# Altium PCB 万年历.PcbDoc
Units mm, origin at the board's own origin, x right, y up, seen from the top; angles counter-clockwise.
Board outline 152.4 x 101.6 mm, 2 copper layers (Top Layer, Bottom Layer); 25 components, 35 nets, 134 pads, 5 vias.
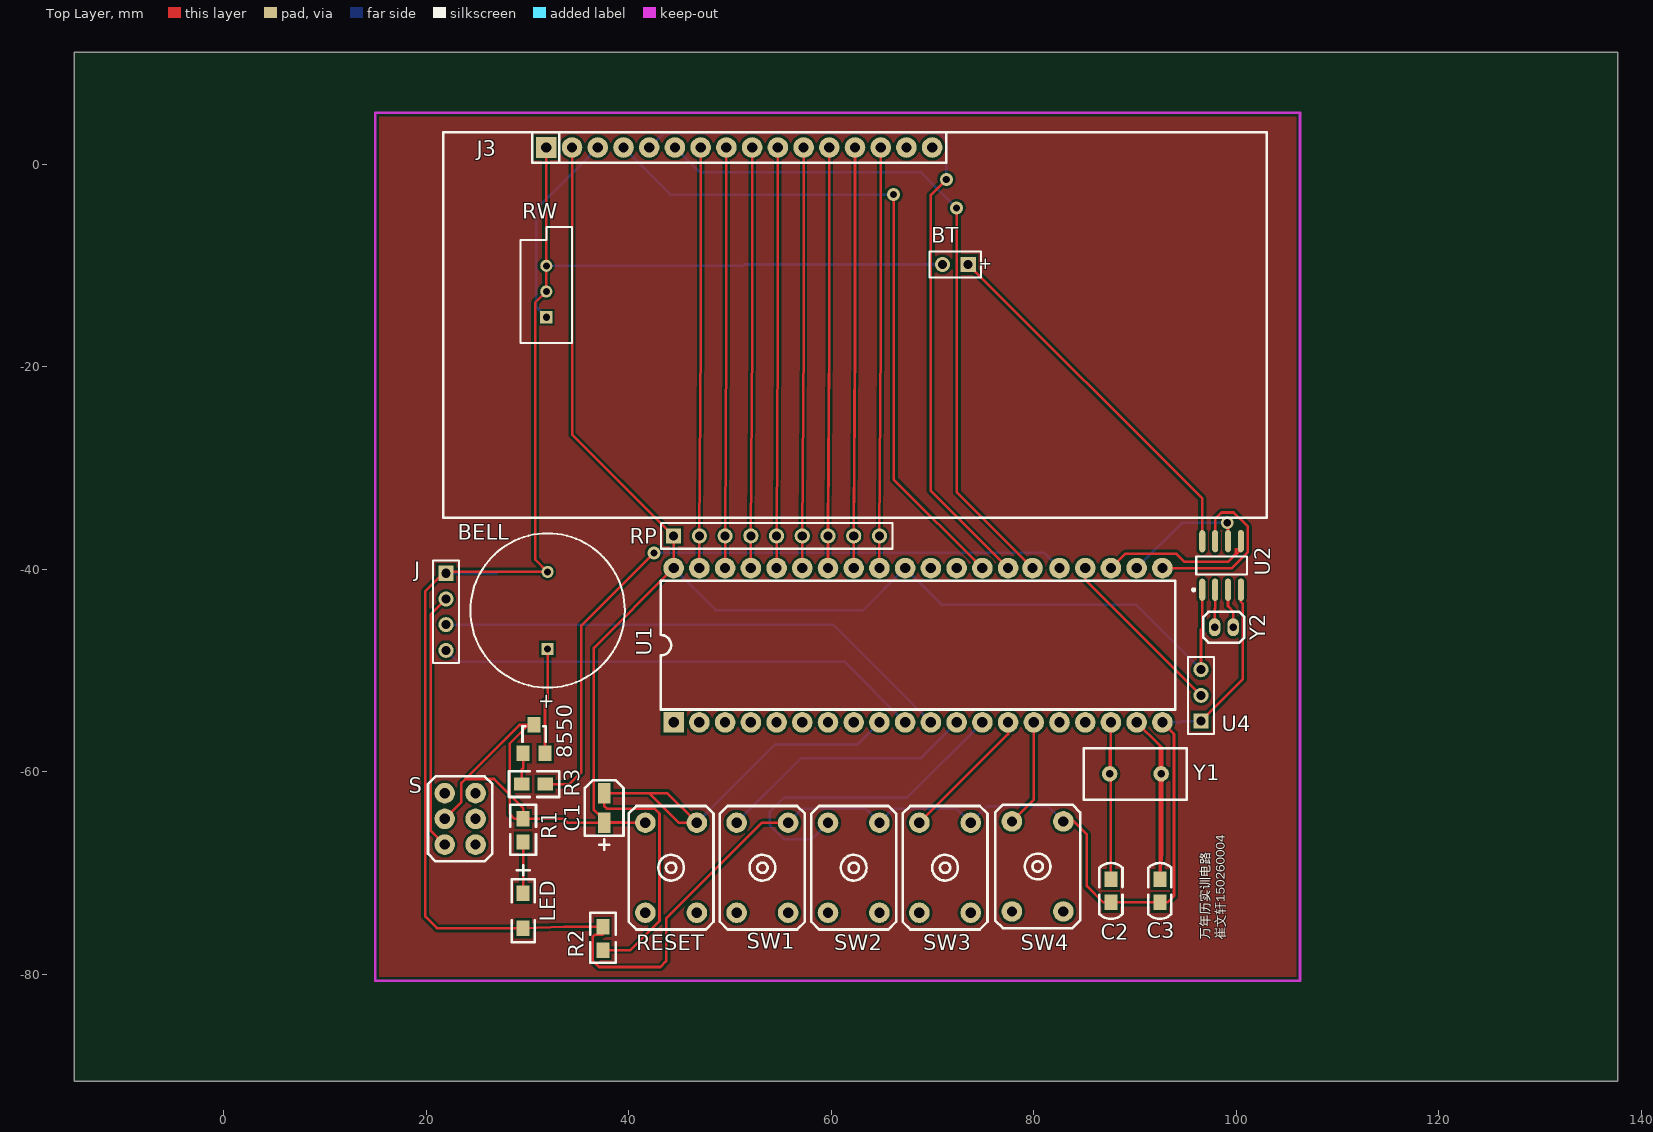
[diagram p0: Top Layer view]
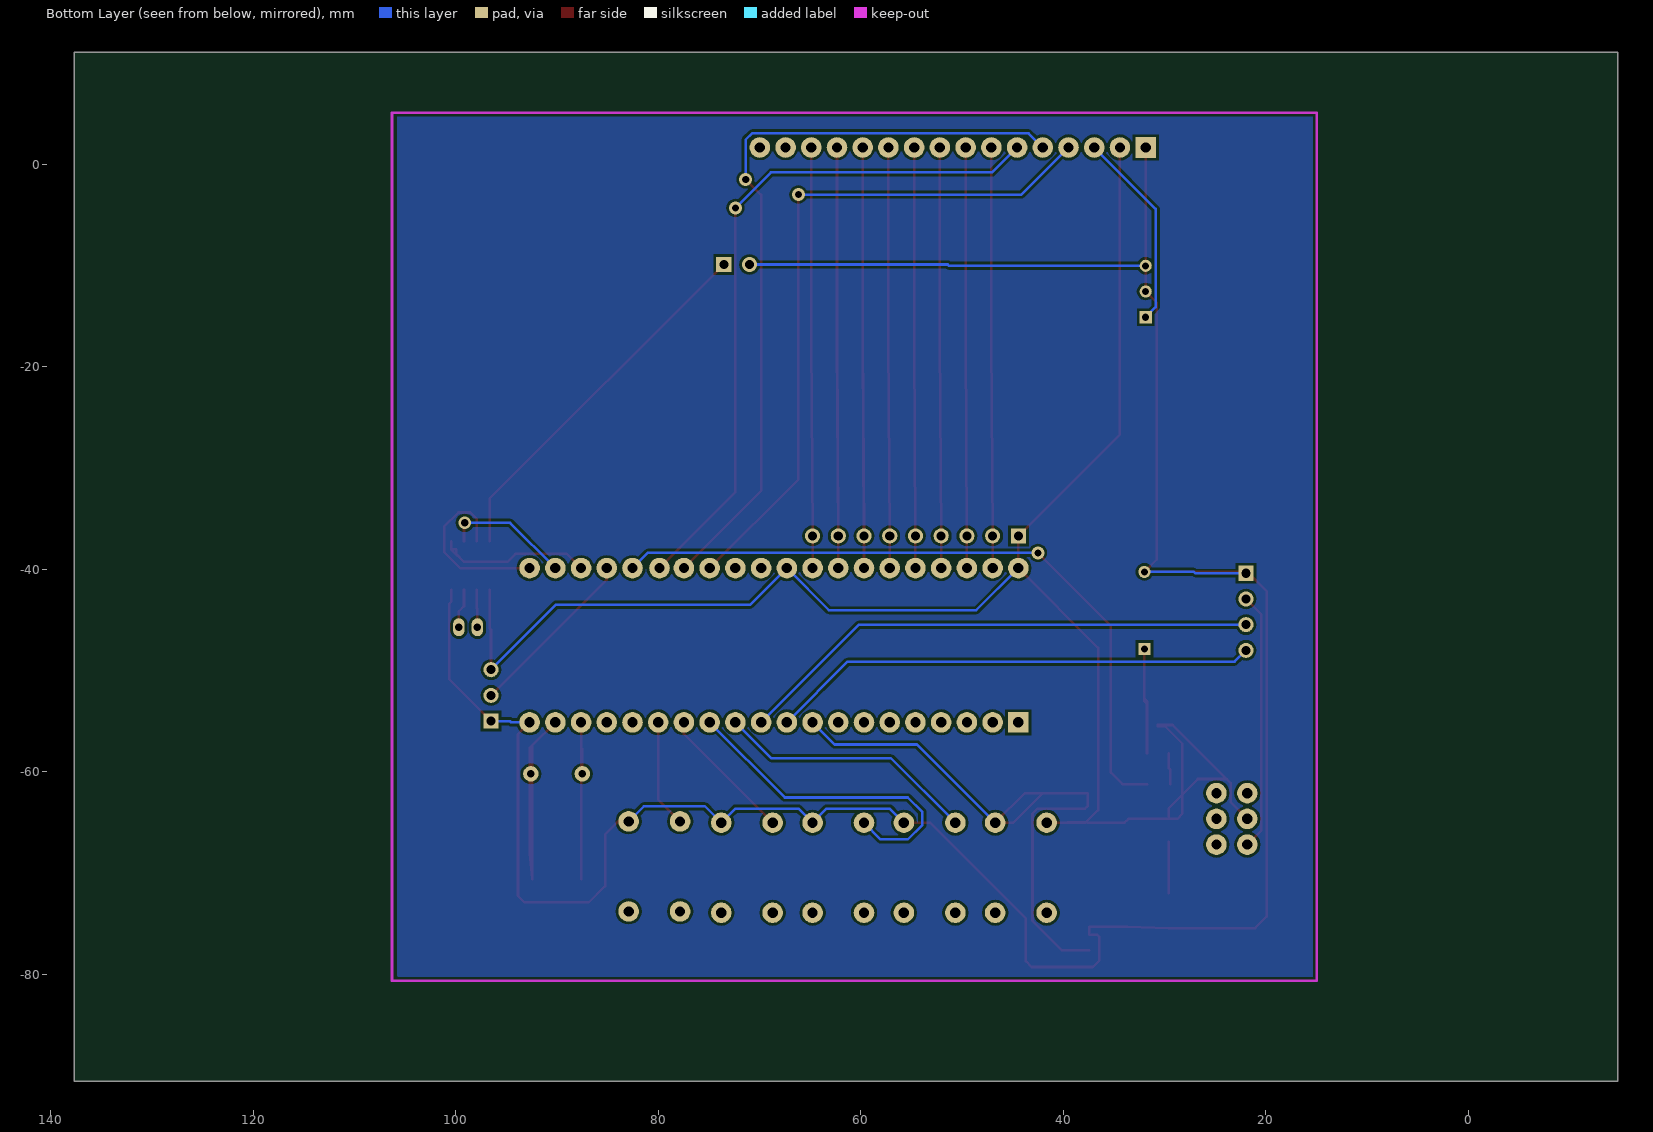
[diagram p1: Bottom Layer view, seen from below]

## Layer stack, top to bottom
Top Solder: solder mask 0.0102, Solder Resist, Dk 3.5
Top Layer: signal copper 0.0356
Dielectric 1: dielectric 0.32, FR-4, Dk 4.8
Bottom Layer: signal copper 0.0356
Bottom Solder: solder mask 0.0102, Solder Resist, Dk 3.5

## Board outline
-14.732,-90.551 137.668,-90.551 137.668,11.049 -14.732,11.049

## Design rules (kind name [scope] priority, off if disabled: settings)
Clearance [All] p1: gap=0.254 ignorepadtopadclearanceinfootprint=FALSE except(0: Arc-Hole Track-Hole SMDPad-Hole THPad-Hole Via-Hole Fill-Hole Poly-Hole Region-Hole Text-Hole)
PolygonConnect [All] p1: connectstyle=Relief reliefconductorwidth=0.254 reliefentries=4 polygonreliefangle="90 Angle" airgapwidth=0.254
RoutingVias [All] p1: holewidth=0.711 width=1.27 viastyle="Through Hole" minholewidth=0.711 minwidth=1.27 maxholewidth=0.711 maxwidth=1.27
SolderMaskExpansion [All] p1: expansion=0.102
Width [All] p1: maxlimit=0.254 minlimit=0.254 preferedwidth=0.254
30 further rules are at their usual default settings.

## Components (designator, comment, footprint, x,y, rotation, side; value= is the part's Value field where it differs from the comment)
8550 "2N3906" SOT_23_BCE 29.527,-58.166 r0 top
BELL "Bell" RB7.6-15 32.004,-44.069 r270 top (schematic designator LS?)
BT "Battery" BAT-2 72.263,-9.906 r180 top (schematic designator BT?)
C1 "Cap Pol1" c+ 37.592,-65.024 r90 top value=10uF
C2 "Cap" 0805-C 87.63,-71.755 r90 top value=22pF
C3 "Cap" 0805-C 92.456,-71.755 r90 top value=22pF
J "UART" HDR1X4 21.971,-40.386 r270 top
J3 "LCD1602" LCD1602 21.717,3.175 r0 top (schematic designator U3)
LED "LED" 1206-LED 29.591,-72.009 r270 top (schematic designator ?)
R1 "Res2" 0805-R 29.591,-65.786 r90 top value=1K
R2 "Res2" 0805-R 37.465,-76.454 r90 top value=10K
R3 "Res2" 0805-R 30.607,-61.214 r0 top value=1K
RESET "SW-PB" SW 44.196,-69.469 r270 top (schematic designator SW0)
RP "RP" HDR1X9 44.45,-36.703 r0 top (schematic designator 10K)
RW "RPot" VR5 31.877,-12.573 r90 top value=5K
S "SW-SPST" KEY 23.368,-64.643 r90 top
SW1 "SW-PB" SW 53.213,-69.469 r270 top
SW2 "SW-PB" SW 62.23,-69.469 r270 top
SW3 "SW-PB" SW 71.247,-69.469 r270 top
SW4 "SW-PB" SW 80.391,-69.342 r270 top
U1 "STC89C52" STC89C52 44.45,-55.118 r90 top
U2 "DS1302" SO8_N 98.552,-39.624 r90 top
U4 "DS18B20" HDR1X3 96.52,-54.991 r90 top
Y1 "XTAL" XTAL-11.0592M 95.123,-62.738 r180 top
Y2 "XTAL" XTAL-32.768K 98.781,-45.72 r90 top

## Footprints (in the part's own frame and the unit in brackets; to place one, negate y for a bottom-side part, rotate by r counter-clockwise, add the part's x,y. Pads: shape width x height; smd on the part's side, far side on the other; paste and mask are expansions set on the pad)
0805-C [mil]
  rect 60x50 smd: 1(-45,0) 2(45,0)
  silkscreen extent -109,-45 109,45
0805-R [mil]
  rect 60x50 smd: 1(-45,0) 2(45,0)
  silkscreen extent -95,-50 100,50
1206-LED [mil]
  rect 60x50 smd: 1(0,0) 2(135,0)
  silkscreen extent -110,-45 190,45
BAT-2 [mm] "Battery; 2 Leads"
  rect 1.5x1.5 hole 0.9: 1(-1.27,0)
  round 1.5 hole 0.9: 2(1.27,0)
  silkscreen extent -2.54,-1.27 2.54,1.27
c+ [mil]
  rect 80x50 smd: 1(0,0) 2(115,0)
  silkscreen extent -105,-75 165,75
HDR1X3 [mm] "Connector; Header; 3 Position"
  rect 1.5x1.5 hole 0.9: 1(0,0)
  round 1.5 hole 0.9: 2(2.54,0) 3(5.08,0)
  silkscreen extent -1.27,-1.27 6.35,1.27
HDR1X4 [mm] "Connector; Header; 4 Position"
  rect 1.5x1.5 hole 0.9: 1(0,0)
  round 1.5 hole 0.9: 2(2.54,0) 3(5.08,0) 4(7.62,0)
  silkscreen extent -1.27,-1.27 8.89,1.27
HDR1X9 [mm] "Connector; Header; 9 Position"
  rect 1.5x1.5 hole 0.9: 1(0,0)
  round 1.5 hole 0.9: 2(2.54,0) 3(5.08,0) 4(7.62,0) 5(10.16,0) 6(12.7,0) 7(15.24,0) 8(17.78,0) 9(20.32,0)
  silkscreen extent -1.27,-1.27 21.59,1.27
KEY [mil]
  round 80 hole 40: 1(-100,60) 2(0,60) 3(100,60) 4(-100,-60) 5(0,-60) 6(100,-60)
  silkscreen extent -165,-125 165,125
LCD1602 [mil]
  rect 80x80 hole 40: 1(400,-60)
  round 80 hole 40: 2(500,-60) 3(600,-60) 4(700,-60) 5(800,-60) 6(900,-60) 7(1000,-60) 8(1100,-60) 9(1200,-60) 10(1300,-60) 11(1400,-60) 12(1500,-60) 13(1600,-60) 14(1700,-60) 15(1800,-60) 16(1900,-60)
  silkscreen extent 0,-1500 3200,0
RB7.6-15 [mm] "Polarized Capacitor (Radial); 2 Leads"
  rect 1.2x1.2 hole 0.7: 1(3.81,0)
  round 1.2 hole 0.7: 2(-3.81,0)
  silkscreen extent -7.62,-7.62 7.62,7.62
SO8_N [mm] "SOIC, 8-Leads, Body 4.9x3.9mm, Pitch 1.27mm, IPC Medium Density"
  oval 2.2x0.6 smd: 1(-2.4,1.905) 2(-2.4,0.635) 3(-2.4,-0.635) 4(-2.4,-1.905) 5(2.4,-1.905) 6(2.4,-0.635) 7(2.4,0.635) 8(2.4,1.905)
  silkscreen extent -2.52,-2.5 0.9,2.88, body extent -2,-2.5 2,2.5, height 1.75
SOT_23_BCE [mil]
  rect 50x60 smd: 1(45,110) 2(2.5,0) 3(87.5,0)
  silkscreen extent 0,45 90,105
STC89C52 [mil]
  rect 80x80 hole 40: 1(0,0)
  round 80 hole 40: 2(0,-100) 3(0,-200) 4(0,-300) 5(0,-400) 6(0,-500) 7(0,-600) 8(0,-700) 9(0,-800) 10(0,-900) 11(0,-1000) 12(0,-1100) 13(0,-1200) 14(0,-1300) 15(0,-1400) 16(0,-1500) 17(0,-1600) 18(0,-1700) 19(0,-1800) 20(0,-1900) 21(600,-1900) 22(600,-1800) 23(600,-1700) 24(600,-1600) 25(600,-1500) 26(600,-1395) 27(600,-1300) 28(600,-1200) 29(600,-1100) 30(600,-1000) 31(600,-900) 32(600,-800) 33(600,-700) 34(600,-600) 35(600,-500) 36(600,-400) 37(600,-300) 38(600,-200) 39(600,-100) 40(600,0)
  silkscreen extent 50,-1950 550,50
SW [mil]
  round 80 hole 40: 1(-175,100) 2(-175,-100) 3(175,-100) 4(175,100)
  silkscreen extent -240,-165 240,165
VR5 [mm] "Thru-Hole; 3 Leads"
  rect 1.2x1.2 hole 0.7: 1(-2.54,0)
  round 1.2 hole 0.7: 2(0,0) 3(2.54,0)
  silkscreen extent -5.08,-2.54 6.35,2.54
XTAL-11.0592M [mil]
  round 60 hole 30: 1(100,-100) 2(300,-100)
  silkscreen extent 0,-200 400,0
XTAL-32.768K [mil]
  oval 70x45 hole 30: 1(0,36) 2(0,-36)
  silkscreen extent -60,-80 60,80

## Part data
8550: "PNP General Purpose Amplifier", ComponentLink1Description="Manufacturer Link", ComponentLink1URL=http://www.fairchildsemi.com/, ComponentLink2Description=Datasheet, ComponentLink2URL=http://www.fairchildsemi.com/ds/2N%2F2N3906.pdf, DatasheetVersion=1997, LatestRevisionDate=15-Jan-2003, LatestRevisionNote="PCB Footprint 'BCY-W3/D4.7' replaced", PackageDescription="TO, Flat Index; 3 In-Line, Axial Leads; Body Dia. 4.5mm; Leads 0.51 x 0.48 mm (max)", PackageReference=TO-92A, PackageVersion=Sep-1998, Published=8-Jun-2000, Publisher="Altium Limited"
BELL: "Electrical Bell", LatestRevisionDate=17-Jul-2002, LatestRevisionNote="Re-released for DXP Platform.", PackageReference=PIN2, Published=24-Mar-1999, Publisher="Altium Limited"
BT: "Multicell Battery", LatestRevisionDate=17-Jul-2002, LatestRevisionNote="Re-released for DXP Platform.", PackageDescription="Battery; 2 Leads", PackageReference=BAT-2, Published=24-Mar-1999, Publisher="Altium Limited"
C1: "Polarized Capacitor (Radial)", LatestRevisionDate=17-Jul-2002, LatestRevisionNote="Re-released for DXP Platform.", PackageDescription="Polarized Capacitor (Radial); 2 Leads", PackageReference=RB7.6-15, Published=8-Jun-2000, Publisher="Altium Limited"
C2 C3: "Capacitor", LatestRevisionDate=17-Jul-2002, LatestRevisionNote="Re-released for DXP Platform.", PackageDescription="Radial Cap, Thru-Hole; 2 Leads; 0.3 in Pin Spacing", PackageReference=RAD-0.3, Published=8-Jun-2000, Publisher="Altium Limited"
LED: library part LED0, "Typical INFRARED GaAs LED", LatestRevisionDate=08-Jul-2005, LatestRevisionNote="Mech Layer 1 removed.", PackageDescription="LED; 2 Leads", PackageReference=LED-0, Published=8-Jun-2000, Publisher="Altium Limited"
R1 R2 R3: "Resistor", LatestRevisionDate=17-Jul-2002, LatestRevisionNote="Re-released for DXP Platform.", PackageDescription="Axial Device, Thru-Hole; 2 Leads; 0.4 in Pin Spacing", PackageReference=AXIAL-0.4, Published=8-Jun-2000, Publisher="Altium Limited"
RESET SW1 SW2 SW3 SW4: "Switch", LatestRevisionDate=17-Jul-2002, LatestRevisionNote="Re-released for DXP Platform.", PackageDescription="Switch; 2 Leads", PackageReference=SPST-2, Published=24-Mar-1999, Publisher="Altium Limited"
RW: "Potentiometer", LatestRevisionDate=17-Jul-2002, LatestRevisionNote="Re-released for DXP Platform.", PackageDescription="Variable Resistor, Thru-Hole; 3 Leads", PackageReference=VR5, Published=8-Jun-2000, Publisher="Altium Limited", Set Position=0.5, Sim Note="Enter the Resistance value and the set point into parameter fields."
S: "Single-Pole, Single-Throw Switch", LatestRevisionDate=17-Jul-2002, LatestRevisionNote="Re-released for DXP Platform.", PackageDescription="Switch; 2 Leads", PackageReference=SPST-2, Published=24-Mar-1999, Publisher="Altium Limited"
Y1 Y2: "Crystal Oscillator", LatestRevisionDate=17-Jul-2002, LatestRevisionNote="Re-released for DXP Platform.", PackageDescription="Crystal, Thru-Hole; 2 Leads; Body 3.1 x 8.2 mm (Dia.xH)", PackageReference=R38, Published=8-Jun-2000, Publisher="Altium Limited"

## Via types
v1: diameter 1.27, hole 0.711, Top Layer to Bottom Layer, 5 vias

## Nets (pads, with @x,y where several pads share a name; then routed paths per layer and width w, separated by ;. In a path a pad name is that pad's centre, name@x,y a point inside that pad or via, vN(x,y) a via of type N, cw(c..) or ccw(c..) an arc to the next point about the centre after c; other vN are vias at no path point)
D0: J3.7 RP.2 U1.39 | length 41.5
  Top Layer w0.254: U1.39 RP.2 47.117,-17.399 J3.7
D1: J3.8 RP.3 U1.38 | length 41.5
  Top Layer w0.254: U1.38 RP.3 49.657,-17.399 J3.8
D2: J3.9 RP.4 U1.37 | length 41.5
  Top Layer w0.254: U1.37 RP.4 52.197,-17.399 J3.9
D3: J3.10 RP.5 U1.36 | length 41.5
  Top Layer w0.254: U1.36 RP.5 54.737,-17.399 J3.10
D4: J3.11 RP.6 U1.35 | length 41.5
  Top Layer w0.254: U1.35 RP.6 57.277,-17.399 J3.11
D5: J3.12 RP.7 U1.34 | length 41.5
  Top Layer w0.254: U1.34 RP.7 59.817,-17.399 J3.12
D6: J3.13 RP.8 U1.33 | length 41.5
  Top Layer w0.254: U1.33 RP.8 62.357,-17.399 J3.13
D7: J3.14 RP.9 U1.32 | length 41.5
  Top Layer w0.254: U1.32 RP.9 64.897,-17.399 J3.14
GND: BELL.2 BT.2 C2.1 C3.1 J3.1 J.1 LED.2 R2.2 RW.2 RW.3 SW1.1 SW2.1 SW3.1 SW4.1 U1.20 U2.4 U4.1 | length 271.8
  Top Layer w0.254: J3.1 RW.3 RW.2 30.785,-13.665 30.785,-39.04 BELL.2 21.971,-40.259 21.844,-40.259 19.939,-42.164 19.939,-74.295 21.082,-75.438 LED.2 33.655,-75.311 R2.2 37.465,-76.073 36.703,-76.073 36.449,-76.327 36.449,-78.638 37.084,-79.273 43.129,-79.273 43.713,-78.689 43.713,-74.498 53.188,-65.024 SW1.1 ; SW4.1 83.972,-64.897 85.242,-66.167 85.242,-71.272 86.868,-72.898 C2.1 C3.1 93.218,-72.898 93.853,-72.263 93.853,-56.261 U1.20 ; U4.1 100.66,-50.851 100.66,-43.409 100.457,-43.205 U2.4
  Bottom Layer w0.254: J.1 27,-40.386 27.127,-40.259 BELL.2 ; RW.3 51.308,-10.033 51.435,-9.906 BT.2 ; SW1.1 57.15,-63.627 63.373,-63.627 SW2.1 66.167,-63.627 72.39,-63.627 SW3.1 75.413,-63.398 81.432,-63.398 SW4.1 ; U1.20 94.539,-55.118 94.666,-54.991 U4.1
Net8550_2: 8550.2 R3.1 | length 3.1
  Top Layer w0.254: R3.1 29.464,-59.766 29.591,-59.639 8550.2
Net8550_3: 8550.3 BELL.1 | length 11
  Top Layer w0.254: 8550.3 31.75,-53.289 ; BELL.1 32.004,-52.756 ; 31.75,-53.289 31.75,-53.01 32.004,-52.756 ; 31.75,-53.289 32.004,-53.035 32.004,-52.756
Net?_1: LED.1 R1.1 | length 5.1
  Top Layer w0.254: LED.1 R1.1
NetBT?_1: BT.1 U2.8 | length 36.9
  Top Layer w0.254: BT.1 96.647,-33.02 U2.8
NetC1_2: C1.2 R2.1 RESET.1 U1.9 | length 62.8
  Top Layer w0.254: R2.1 40.183,-77.597 43.053,-74.727 43.053,-64.135 42.545,-63.627 37.846,-63.627 37.592,-63.373 C1.2 42.012,-62.103 ; 42.012,-62.103 43.815,-62.103 RESET.1 44.933,-65.024 42.012,-62.103
  Bottom Layer w0.254: RESET.1 54.458,-57.302 62.586,-57.302 U1.9
NetC2_2: C2.2 U1.18 Y1.2 | length 18.1
  Top Layer w0.254: Y1.2 87.503,-57.734 87.63,-57.607 ; C2.2 87.63,-60.198 87.63,-57.607 ; U1.18 87.63,-57.607
NetC3_2: C3.2 U1.19 Y1.1 | length 29.9
  Top Layer w0.254: U1.19 92.456,-57.404 ; Y1.1 Y1.1@92.456,-60.198 ; Y1.1@92.456,-60.198 92.456,-57.404 ; Y1.1@92.456,-60.198 C3.2 92.71,-68.021 92.71,-57.658 92.456,-57.404
NetJ_2: J.2 S.1 | length 25.5
  Top Layer w0.254: S.1 20.447,-65.786 20.447,-44.45 J.2
NetJ_3: J.3 U1.11 | length 51.9
  Bottom Layer w0.254: J.3 60.198,-45.466 U1.11
NetJ_4: J.4 U1.10 | length 48.3
  Bottom Layer w0.254: J.4 23.089,-49.124 61.316,-49.124 U1.10
NetR3_2: R3.2 U1.25 | length 69.4
  Top Layer w0.254: R3.2 34.163,-61.214 35.306,-60.071 35.306,-45.593 v1(42.52,-38.379)
  Bottom Layer w0.254: v1(42.52,-38.379) 81.051,-38.379 U1.25
NetRW_1: J3.3 RW.1 | length 19.7
  Bottom Layer w0.254: RW.1 30.886,-14.122 30.886,-4.42 J3.3
NetSW1_2: SW1.2 U1.12 | length 25.8
  Bottom Layer w0.254: SW1.2 57.048,-58.649 68.859,-58.649 U1.12
NetSW2_2: SW2.2 U1.13 | length 33
  Bottom Layer w0.254: SW2.2 58.039,-66.675 55.372,-66.675 53.924,-65.227 53.924,-63.983 55.372,-62.535 67.513,-62.535 U1.13
NetSW3_2: SW3.2 U1.14 | length 13.5
  Top Layer w0.254: SW3.2 77.47,-56.261 U1.14
NetSW4_2: SW4.2 U1.15 | length 10.7
  Top Layer w0.254: SW4.2 80.01,-62.738 U1.15
NetU1_21: U1.21 U2.7 | length 17.9
  Top Layer w0.254: U1.21 99.568,-39.878 101.143,-38.303 101.143,-35.789 99.746,-34.392 98.552,-34.392 97.917,-35.027 U2.7
NetU1_22: U1.22 U2.6 | length 12.6
  Top Layer w0.254: v1(99.111,-35.408) 99.187,-35.484 U2.6
  Bottom Layer w0.254: U1.22 94.64,-35.408 v1(99.111,-35.408)
NetU1_23: U1.23 U2.5 | length 17.1
  Top Layer w0.254: U1.23 89.027,-38.481 94.107,-38.481 94.894,-39.268 99.162,-39.268 ; U2.5 U2.5@100.457,-38.024 ; 99.162,-39.268 99.212,-39.268 U2.5@100.457,-38.024 ; 99.162,-39.268 99.949,-38.481 99.949,-38.024 U2.5@100.457,-38.024
NetU1_24: U1.24 U4.2 | length 17.3
  Top Layer w0.254: U1.24 85.09,-41.021 U4.2
NetU1_26: J3.6 U1.26 | length 68.9
  Top Layer w0.254: v1(72.39,-4.318) 72.39,-32.385 U1.26
  Bottom Layer w0.254: J3.6 47.041,-0.813 68.885,-0.813 v1(72.39,-4.318)
NetU1_27: J3.5 U1.27 | length 76.3
  Top Layer w0.254: v1(71.374,-1.499) 69.85,-3.023 69.85,-32.258 U1.27
  Bottom Layer w0.254: J3.5 43.434,3.048 70.739,3.048 71.374,2.413 v1(71.374,-1.499)
NetU1_28: J3.4 U1.28 | length 69.1
  Top Layer w0.254: v1(66.167,-2.997) 66.167,-31.115 U1.28
  Bottom Layer w0.254: J3.4 44.145,-2.997 v1(66.167,-2.997)
NetU2_2: U2.2 Y2.1 | length 3.7
  Top Layer w0.254: Y2.1 97.866,-43.917 97.917,-43.866 U2.2
NetU2_3: U2.3 Y2.2 | length 3.9
  Top Layer w0.254: U2.3 99.187,-43.637 99.695,-44.145 Y2.2
VCC: 8550.1 C1.1 J3.2 R1.2 RESET.2 RP.1 S.2 U1.31 U1.40 U2.1 U4.3 | length 192
  Top Layer w0.254: S.2 23.495,-62.992 23.495,-61.087 23.876,-60.706 ; J3.2 34.417,-26.67 RP.1 U1.40 36.576,-47.752 36.576,-63.779 C1.1@37.706,-64.91 ; U4.3 96.52,-45.974 96.647,-45.847 U2.1 ; 23.876,-60.706 29.21,-55.372 8550.1@30.099,-55.372 ; 23.876,-60.706 26.721,-60.706 28.245,-62.23 ; 28.245,-62.23 29.591,-63.576 R1.2 ; 28.245,-62.23 28.245,-57.226 29.972,-55.499 ; 28.245,-62.23 28.245,-64.135 28.753,-64.643 R1.2 ; R1.2 33.579,-64.643 33.96,-65.024 C1.1 C1.1@37.706,-64.91 ; 29.972,-55.499 30.67,-55.499 8550.1 8550.1@30.099,-55.372 ; 29.972,-55.499 8550.1@30.099,-55.372 ; C1.1@37.706,-64.91 37.821,-65.024 RESET.2 C1.1@37.706,-64.91
  Bottom Layer w0.254: U1.40 48.616,-44.044 63.144,-44.044 U1.31 70.917,-43.485 90.094,-43.485 U4.3
pads on no net: J3.15 J3.16 RESET.3 RESET.4 S.3 S.4 S.5 S.6 SW1.3 SW1.4 SW2.3 SW2.4 SW3.3 SW3.4 SW4.3 SW4.4 U1.1 U1.2 U1.3 U1.4 U1.5 U1.6 U1.7 U1.8 U1.16 U1.17 U1.29 U1.30

## Polygon pours and split planes (outlines as drawn)
no net on Bottom Layer "Bottom Layer-No Net" (solid, pour order 2): 14.986,5.08 105.791,5.08 105.791,-80.137 106.045,-80.391 14.986,-80.391
no net on Top Layer "Top Layer-No Net" (solid, pour order 0): 14.986,4.699 15.367,5.08 106.299,5.08 106.299,-80.391 14.986,-80.391

## Keep-outs
Keep-Out Layer:
  lines w0.254: 14.986,-80.645 14.986,5.08 15.113,5.08 18.923,5.08 106.299,5.08 106.299,-80.645 14.986,-80.645

## Silkscreen, mask and mechanical layers (free items; w line width, h text height)
Top Overlay:
  text "万年历实训电路 / 崔文轩150260004" at 99.187,-76.581 h1.52 r90

## Text inside footprints (layer, text, board x,y; h text height)
BELL: Top Overlay "+" at 31.267,-52.201 h1.5 r270
BT: Top Overlay "+" at 75.933,-9.329 h1.15 r180